# EAGLE board FlashDestroyer-v1 (EAGLE 5.06)
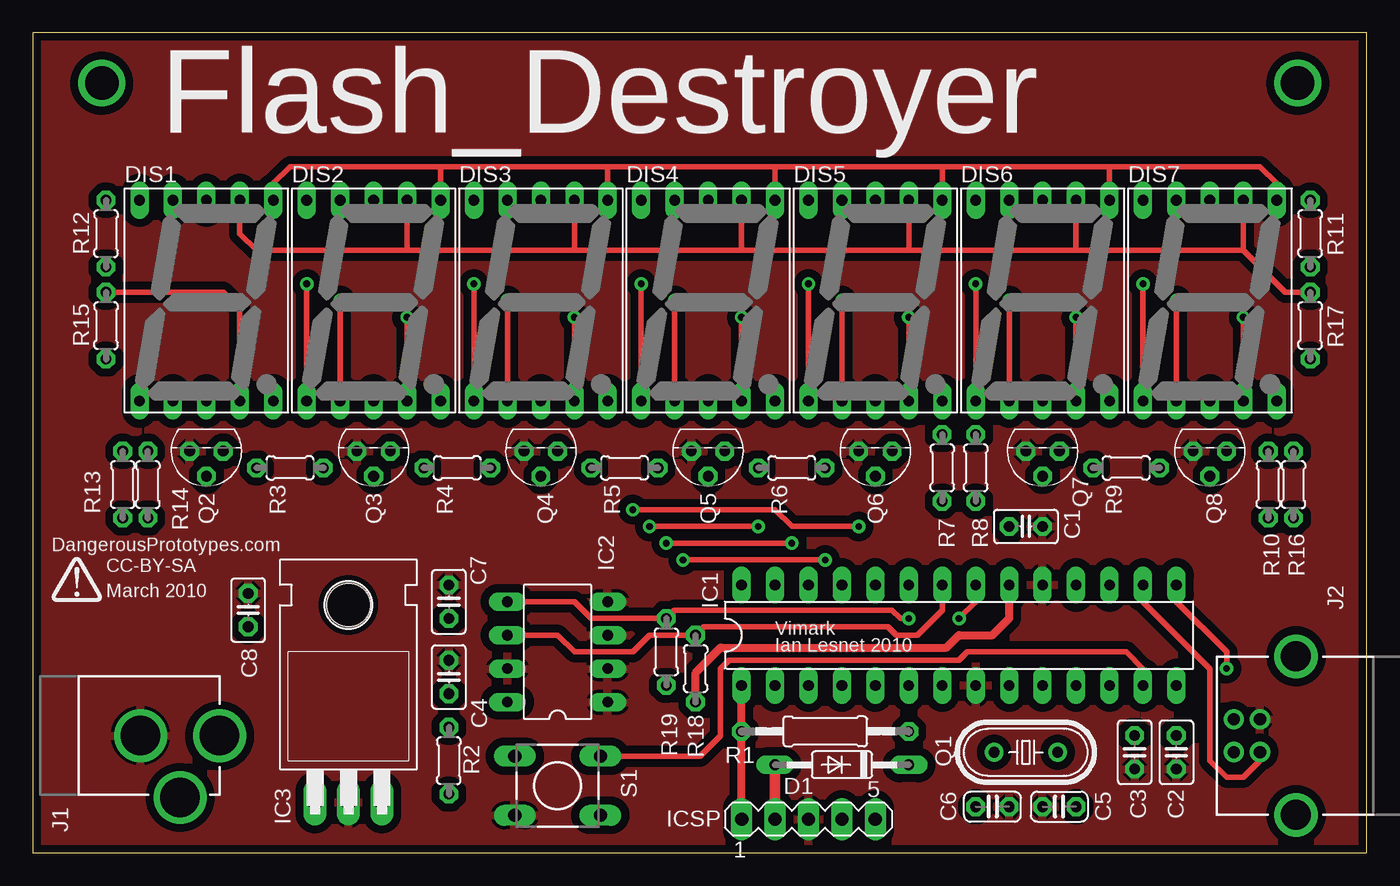
[diagram p0: board, top side]
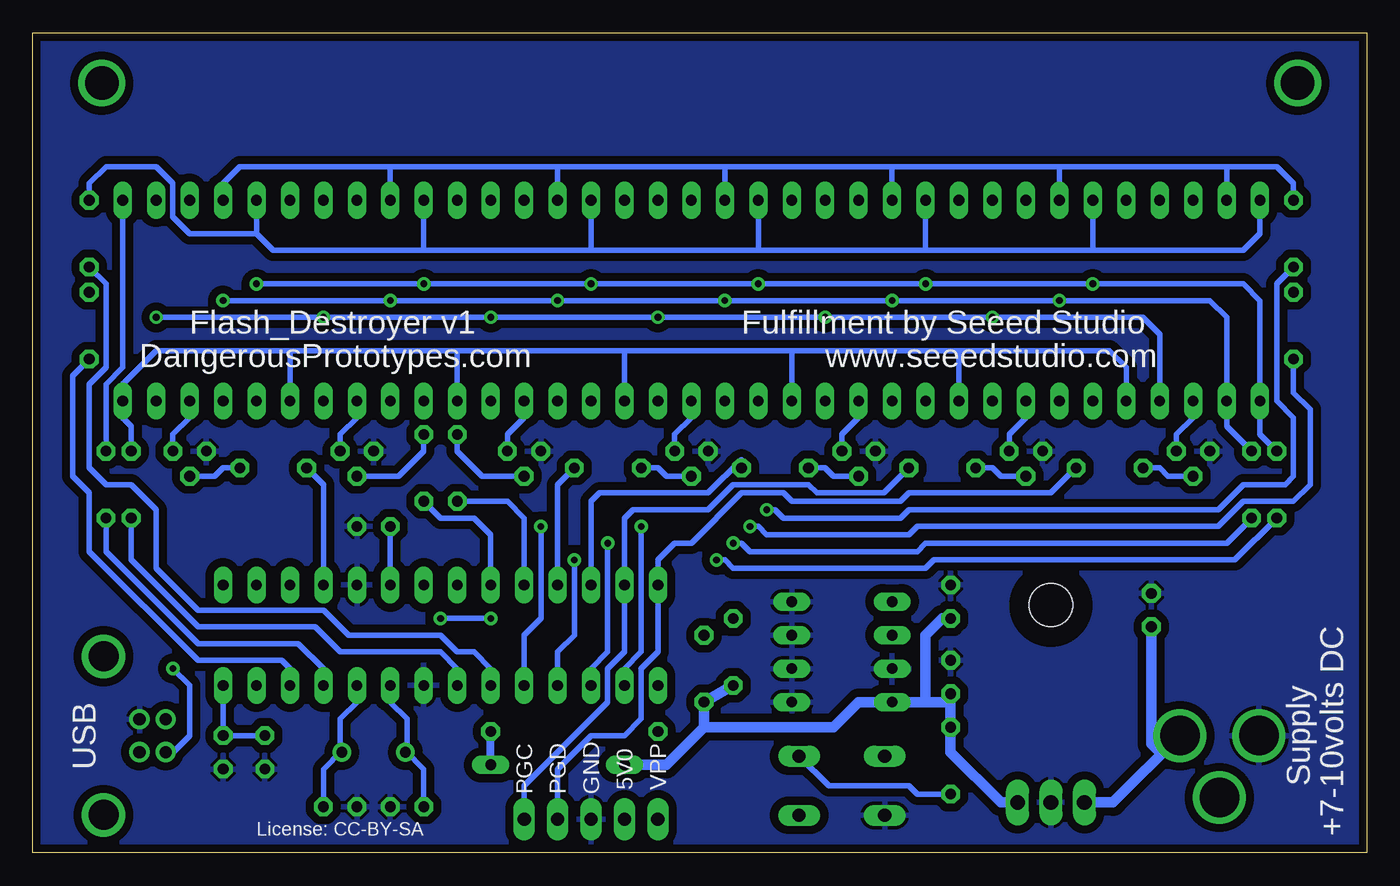
[diagram p1: board, bottom side, seen from below]

Size 101.27 x 62.22 mm. Coordinates in mm from the lower left corner, seen from the top.
Outline: 0,0 101.27,0 101.27,62.22 0,62.22 0,0
Copper layers (1*16): Top 0.035mm / dielectric 1.5mm / Bottom 0.035mm
Design rules "SparkFun": minimum track width 8mil, minimum drill 20mil, track to track 8mil, track to pad 8mil, pad to pad 8mil, via to via 8mil, smd to smd 8mil, copper to edge 10mil, drill to drill 8mil, minimum pad ring 12mil, minimum via ring 10mil, stop-mask expansion 4mil, vias tented up to drill 25mil, thermal gap 10mil

## Footprints (pad centres in the part's own frame; a part is rotated, then mirrored left to right if it is on the bottom)
C025-025X050 = drill 0.813 octagon: 1 -1.27,0; 2 1.27,0
C025-024X044 = drill 0.813 octagon: 1 -1.27,0; 2 1.27,0
DO35-10 = drill 0.813 long: A 5.08,0; C -5.08,0
HDSP-M = drill 0.813 long: 1 -5.08,-7.62; 2 -2.54,-7.62; 3 0,-7.62; 4 2.54,-7.62; 5 5.08,-7.62; 6 5.08,7.62; 7 2.54,7.62; 8 0,7.62; 9 -2.54,7.62; 10 -5.08,7.62
DIL28-3 = drill 0.813 long: 1 -16.51,-3.81; 2 -13.97,-3.81; 3 -11.43,-3.81; 4 -8.89,-3.81; 5 -6.35,-3.81; 6 -3.81,-3.81; 7 -1.27,-3.81; 8 1.27,-3.81; 9 3.81,-3.81; 10 6.35,-3.81; 11 8.89,-3.81; 12 11.43,-3.81; 13 13.97,-3.81; 14 16.51,-3.81; 15 16.51,3.81; 16 13.97,3.81; 17 11.43,3.81; 18 8.89,3.81; 19 6.35,3.81; 20 3.81,3.81; 21 1.27,3.81; 22 -1.27,3.81; 23 -3.81,3.81; 24 -6.35,3.81; 25 -8.89,3.81; 26 -11.43,3.81; 27 -13.97,3.81; 28 -16.51,3.81
DIL8 = drill 0.813 long: 1 -3.81,-3.81; 2 -1.27,-3.81; 3 1.27,-3.81; 4 3.81,-3.81; 5 3.81,3.81; 6 1.27,3.81; 7 -1.27,3.81; 8 -3.81,3.81
TO220H = drill 1.118 long: 1 -2.54,-10.16; 2 0,-10.16; 3 2.54,-10.16 | hole 3.302: 0,4.826
MA05-1 = drill 1.016 long: 1 -5.08,0; 2 -2.54,0; 3 0,0; 4 2.54,0; 5 5.08,0
POWER_JACK_PTH = drill 2.997 round: GND 0,7.7; GNDBREAK 4.7,10.7; PWR 0,13.7
USB-B-PTH = drill 0.914 round: D+ 0,1.25; D- 1.981,1.25; GND 0,-1.25; VBUS 1.981,-1.25 | drill 2.286 round: P$1 -2.718,-6.02; P$2 -2.718,6.02
HC49U-V = drill 0.813 round: 1 -2.413,0; 2 2.413,0
TO92 = drill 0.813 octagon: 1 1.27,0; 2 0,1.905; 3 -1.27,0
0207/12 = drill 0.813 octagon: 1 -6.35,0; 2 6.35,0
0204/5 = drill 0.813 octagon: 1 -2.54,0; 2 2.54,0
DTS-6 = drill 1 long: 1 -3.25,2.25; 2 3.25,2.25; 3 -3.25,-2.25; 4 3.25,-2.25

## Placement (x,y rotation side)
C1  0.1uf  [C025-025X050]  75.4,24.76 0 top
C2  0.1uf  [C025-025X050]  86.83,7.62 270 top
C3  0.1uf  [C025-025X050]  83.66,7.62 270 top
C4  0.1uf  [C025-025X050]  31.58,13.33 90 top
C5  27pf  [C025-024X044]  77.94,3.49 180 top
C6  27pf  [C025-024X044]  72.86,3.49 0 top
C7  0.1uf  [C025-025X050]  31.58,19.05 90 top
C8  0.33uf  [C025-025X050]  16.34,18.41 90 top
D1  1N4148  [DO35-10]  61.43,6.66 180 top
DIS1  HD-H103  [HDSP-M]  13.17,41.9 0 top
DIS2  HD-H103  [HDSP-M]  25.87,41.9 0 top
DIS3  HD-H103  [HDSP-M]  38.57,41.9 0 top
DIS4  HD-H103  [HDSP-M]  51.27,41.9 0 top
DIS5  HD-H103  [HDSP-M]  63.97,41.9 0 top
DIS6  HD-H103  [HDSP-M]  76.67,41.9 0 top
DIS7  HD-H103  [HDSP-M]  89.37,41.9 0 top
IC1  PIC18F2550_28DIP  [DIL28-3]  70.32,16.51 0 top
IC2  24AA01P  [DIL8]  39.84,15.23 90 top
IC3  7805T  [TO220H]  23.96,13.96 0 top
ICSP  [MA05-1]  58.89,2.54 0 top
J1  POWER_JACKPTH  [POWER_JACK_PTH]  0.47,8.88 270 top
J2  USBPTH  [USB-B-PTH]  93.18,8.88 180 top
Q1  20Mhz  [HC49U-V]  75.4,7.62 180 top
Q2  BC547  [TO92]  13.17,30.48 180 top
Q3  BC547  [TO92]  25.87,30.48 180 top
Q4  BC547  [TO92]  38.57,30.48 180 top
Q5  BC547  [TO92]  51.27,30.48 180 top
Q6  BC547  [TO92]  63.97,30.48 180 top
Q7  BC547  [TO92]  76.67,30.48 180 top
Q8  BC547  [TO92]  89.37,30.48 180 top
R1  10k  [0207/12]  60.16,9.2 0 top
R2  10K  [0204/5]  31.58,6.98 90 top
R3  10k  [0204/5]  19.52,29.21 180 top
R4  10k  [0204/5]  32.22,29.21 180 top
R5  10k  [0204/5]  44.92,29.21 180 top
R6  10k  [0204/5]  57.62,29.21 180 top
R7  10k  [0204/5]  69.05,29.21 90 top
R8  10k  [0204/5]  71.59,29.21 90 top
R9  10k  [0204/5]  83.02,29.21 0 top
R10  100R  [0204/5]  93.81,27.94 90 top
R11  100R  [0204/5]  96.99,46.98 90 top
R12  100R  [0204/5]  5.55,46.98 90 top
R13  100R  [0204/5]  6.82,27.94 90 top
R14  100R  [0204/5]  8.72,27.94 90 top
R15  100R  [0204/5]  5.55,40 90 top
R16  100R  [0204/5]  95.72,27.94 90 top
R17  100R  [0204/5]  96.99,40 90 top
R18  2K2  [0204/5]  50.32,13.96 270 top
R19  2K2  [0204/5]  48.1,15.23 270 top
S1  DTS-6  [DTS-6]  39.84,5.08 180 top
U$1  [DP-LOGO]  1.42,19.05 0 top

## Library data of the parts
C1-C8 R1-R19 = rcl
D1 = diode
DIS1-DIS7 = display-hp
IC1 IC2 = microchip
IC3 = linear
ICSP = con-lstb
J1 J2 = SparkFun
Q1 = crystal
Q2-Q8 = transistor-npn
S1 = switch-tact
U$1 = dp_devices

## Nets
A: DIS1.7 DIS2.7 DIS3.7 DIS4.7 DIS5.7 DIS6.7 DIS7.7 R17.2
B: DIS1.6 DIS2.6 DIS3.6 DIS4.6 DIS5.6 DIS6.6 DIS7.6 R16.2
C: DIS1.4 DIS2.4 DIS3.4 DIS4.4 DIS5.4 DIS6.4 DIS7.4 R15.2
CC1: IC1.28 ICSP.4 R3.1
CC2: IC1.27 ICSP.5 R4.1
CC3: IC1.26 R5.1
CC4: IC1.25 R6.1
CC5: IC1.24 R7.1
CC6: IC1.23 R8.1
CC7: IC1.18 R9.1
D: DIS1.2 DIS2.2 DIS3.2 DIS4.2 DIS5.2 DIS6.2 DIS7.2 R14.2
DP: DIS1.5 DIS2.5 DIS3.5 DIS4.5 DIS5.5 DIS6.5 DIS7.5 R10.2
E: DIS1.1 DIS2.1 DIS3.1 DIS4.1 DIS5.1 DIS6.1 DIS7.1 R13.2
F: DIS1.9 DIS2.9 DIS3.9 DIS4.9 DIS5.9 DIS6.9 DIS7.9 R12.2
G: DIS1.10 DIS2.10 DIS3.10 DIS4.10 DIS5.10 DIS6.10 DIS7.10 R11.2
GND: C1.2 C2.2 C3.2 C4.2 C5.2 C6.2 C7.2 C8.2 IC1.8 IC1.19 IC2.1 IC2.2 IC2.3 IC2.4 IC2.7 IC3.2 ICSP.3 J1.GND J2.GND Q2.1 Q3.1 Q4.1 Q5.1 Q6.1 Q7.1 Q8.1 S1.2
MCLR: IC1.1 ICSP.1 R1.1
N$1: C6.1 IC1.9 Q1.2
N$2: C5.1 IC1.10 Q1.1
N$3: C2.1 C3.1 IC1.14
N$4: IC1.7 R10.1
N$5: IC1.6 R11.1
N$6: DIS2.3 Q3.3
N$7: IC1.5 R12.1
N$8: Q3.2 R4.2
N$9: DIS3.3 Q4.3
N$10: Q4.2 R5.2
N$11: DIS4.3 Q5.3
N$12: Q5.2 R6.2
N$13: DIS5.3 Q6.3
N$14: Q6.2 R7.2
N$15: DIS1.3 Q2.3
N$16: Q2.2 R3.2
N$17: D1.C R1.2
N$18: DIS6.3 Q7.3
N$19: Q7.2 R8.2
N$20: DIS7.3 Q8.3
N$21: Q8.2 R9.2
N$22: IC1.4 R13.1
N$23: IC1.3 R14.1
N$24: IC1.2 R15.1
N$25: IC1.11 R16.1
N$26: IC1.12 R17.1
N$27: IC1.13 R2.1 S1.3
N$29: C8.1 IC3.1 J1.PWR
RC4: IC1.15 J2.D-
RC5: IC1.16 J2.D+
SCL: IC1.22 IC2.6 R18.1
SDA: IC1.21 IC2.5 R19.1
VCC: C1.1 C4.1 C7.1 D1.A IC1.20 IC2.8 IC3.3 ICSP.2 R2.2 R18.2 R19.2

## Tracks (layer width: path | path; a pad name or v marks a point on that pad's centre or on a via)
A
  Top 0.406: DIS1.7 15.71,46.98 16.98,45.71 28.41,45.71 | 28.41,45.71 DIS2.7 | 28.41,45.71 41.11,45.71 | 41.11,45.71 53.81,45.71 | 53.81,45.71 66.51,45.71 | 66.51,45.71 79.21,45.71 | 79.21,45.71 91.91,45.71 | 79.21,45.71 DIS6.7 | 41.11,45.71 DIS3.7 | 53.81,45.71 DIS4.7 | 66.51,45.71 DIS5.7 | 91.91,45.71 DIS7.7 | 91.91,45.71 95.09,42.54 R17.2
B
  Top 0.406: DIS1.6 18.25,50.79 19.52,52.06 30.95,52.06 | 30.95,52.06 DIS2.6 | 30.95,52.06 43.65,52.06 | 43.65,52.06 DIS3.6 | 43.65,52.06 56.35,52.06 | 56.35,52.06 DIS4.6 | 56.35,52.06 69.05,52.06 | 69.05,52.06 DIS5.6 | 69.05,52.06 81.75,52.06 | 81.75,52.06 DIS6.6 | 81.75,52.06 93.18,52.06 94.45,50.79 DIS7.6
  Bottom 0.406: DIS7.6 94.45,36.82 95.72,35.55 R16.2
C  (via drill 0.51)
  Top 0.406: v28.41,40.63 DIS2.4 | DIS1.4 15.71,41.27 14.44,42.54 R15.2 | v91.91,40.63 DIS7.4 | v41.11,40.63 DIS3.4 | v79.21,40.63 DIS6.4 | v66.51,40.63 DIS5.4 | v53.81,40.63 DIS4.4
  Bottom 0.406: DIS1.4 15.71,39.36 16.98,40.63 v28.41,40.63 v41.11,40.63 v53.81,40.63 v66.51,40.63 v79.21,40.63 v91.91,40.63
CC1
  Bottom 0.406: R3.1 23.96,27.3 34.76,27.3 35.4,26.67 43.65,26.67 44.29,27.3 47.46,27.3 51.27,23.49 52.54,23.49 53.81,22.22 IC1.28 53.81,15.23 55.08,13.96 55.08,10.15 56.35,8.88 58.89,8.88 61.43,6.34 ICSP.4
CC2
  Bottom 0.406: R4.1 36.67,27.3 41.75,27.3 42.38,27.94 48.1,27.94 50,26.03 55.72,26.03 56.35,25.39 IC1.27 56.35,15.23 57.62,13.96 57.62,11.42 63.97,5.08 ICSP.5
CC3
  Bottom 0.406: IC1.26 58.89,26.67 58.26,27.3 50,27.3 47.46,29.84 R5.1
CC4
  Bottom 0.406: R6.1 61.43,27.94 IC1.25
CC5
  Bottom 0.406: R7.1 65.24,26.67 63.97,25.39 IC1.24
CC6
  Bottom 0.406: R8.1 70.32,25.39 67.78,25.39 66.51,24.12 IC1.23
CC7
  Bottom 0.406: R9.1 79.21,27.94 IC1.18
D  (via drill 0.51)
  Top 0.406: v23.33,41.9 DIS2.2 | v86.83,41.9 DIS7.2 | v36.03,41.9 DIS3.2 | v74.13,41.9 DIS6.2 | v48.73,41.9 DIS4.2 | v61.43,41.9 DIS5.2
  Bottom 0.406: v86.83,41.9 v74.13,41.9 v61.43,41.9 v48.73,41.9 v36.03,41.9 v23.33,41.9 11.9,41.9 10.63,40.63 DIS1.2 10.63,32.38 R14.2
DP
  Bottom 0.406: DIS1.5 18.25,36.82 19.52,38.09 30.95,38.09 | 30.95,38.09 DIS2.5 | 30.95,38.09 43.65,38.09 | 43.65,38.09 56.35,38.09 | 56.35,38.09 69.05,38.09 | 69.05,38.09 81.75,38.09 | 81.75,38.09 91.91,38.09 94.45,35.55 DIS7.5 94.45,33.02 93.81,32.38 R10.2 | 81.75,38.09 DIS6.5 | 56.35,38.09 DIS4.5 | 43.65,38.09 DIS3.5 | 69.05,38.09 DIS5.5
E  (via drill 0.51)
  Top 0.406: v20.79,43.17 DIS2.1 | v33.49,43.17 DIS3.1 | v46.19,43.17 DIS4.1 | v84.29,43.17 DIS7.1 | v58.89,43.17 DIS5.1 | v71.59,43.17 DIS6.1
  Bottom 0.406: v84.29,43.17 v71.59,43.17 v58.89,43.17 v46.19,43.17 v33.49,43.17 v20.79,43.17 9.36,43.17 8.09,41.9 DIS1.1 8.09,31.75 R13.2
F
  Bottom 0.406: 10.63,52.06 DIS1.9 | 10.63,52.06 23.33,52.06 | 23.33,52.06 DIS2.9 | 23.33,52.06 36.03,52.06 | 36.03,52.06 DIS3.9 | 36.03,52.06 48.73,52.06 | 48.73,52.06 DIS4.9 | 48.73,52.06 61.43,52.06 | 61.43,52.06 DIS5.9 | 61.43,52.06 74.13,52.06 | 74.13,52.06 DIS6.9 | 74.13,52.06 85.56,52.06 86.83,50.79 DIS7.9 | 10.63,52.06 6.82,52.06 5.55,50.79 R12.2
G
  Bottom 0.406: DIS1.10 8.09,46.98 9.36,45.71 20.79,45.71 | 20.79,45.71 DIS2.10 | 20.79,45.71 33.49,45.71 | 33.49,45.71 46.19,45.71 | 46.19,45.71 58.89,45.71 | 58.89,45.71 71.59,45.71 | 71.59,45.71 83.02,45.71 84.29,46.98 | 71.59,45.71 DIS6.10 | 58.89,45.71 DIS5.10 | 46.19,45.71 DIS4.10 | 33.49,45.71 DIS3.10 | 84.29,46.98 DIS7.10 | 84.29,46.98 89.37,46.98 90.64,48.25 90.64,50.79 91.91,52.06 95.72,52.06 96.99,50.79 R11.2
GND
  pour Top (isolate 0.61): 0.47,62.22 103.34,62.22 103.34,-0.01 0.47,-0.01
  pour Bottom (isolate 0.61): 0.47,62.22 103.34,62.22 103.34,-0.01 0.47,-0.01
MCLR
  Top 0.61: ICSP.1 R1.1 IC1.1
N$1
  Bottom 0.406: IC1.9 74.13,11.42 72.86,10.15 72.86,8.38 Q1.2 72.99,7.74 71.59,6.34 C6.1
N$2
  Bottom 0.406: IC1.10 76.67,11.42 77.94,10.15 77.94,8.38 Q1.1 77.81,7.74 79.21,6.34 C5.1
N$3
  Bottom 0.406: IC1.14 C2.1 C3.1
N$4
  Bottom 0.406: IC1.7 69.05,13.96 70.32,15.23 77.94,15.23 79.84,17.14 88.73,17.14 93.81,22.22 R10.1
N$5
  Bottom 0.406: R11.1 95.72,43.17 95.72,36.82 96.99,35.55 96.99,29.21 95.72,27.94 93.81,27.94 91.91,26.03 91.91,21.59 88.73,18.41 79.21,18.41 77.31,16.51 70.32,16.51 69.05,15.23 67.78,15.23 66.51,13.96 IC1.6
N$6
  Bottom 0.406: Q3.3 27.14,31.75 25.87,33.02 DIS2.3
N$7  (via drill 0.51)
  Top 0.406: v45.55,26.03 56.35,26.03 57.62,24.76 v62.7,24.76
  Bottom 0.406: R12.1 6.82,43.17 6.82,34.28 5.55,33.02 5.55,28.57 6.19,27.94 9.36,27.94 11.26,26.03 34.76,26.03 35.4,25.39 44.29,25.39 44.92,26.03 v45.55,26.03 | IC1.5 63.97,16.51 62.7,17.78 v62.7,24.76
N$8
  Bottom 0.406: Q3.2 27.77,28.57 28.41,29.21 R4.2
N$9
  Bottom 0.406: DIS3.3 38.57,33.02 39.84,31.75 Q4.3
N$10
  Bottom 0.406: Q4.2 40.48,28.57 41.11,29.21 R5.2
N$11
  Bottom 0.406: DIS4.3 51.27,33.02 52.54,31.75 Q5.3
N$12
  Bottom 0.406: Q5.2 53.18,28.57 53.81,29.21 R6.2
N$13
  Bottom 0.406: DIS5.3 63.97,33.02 65.24,31.75 Q6.3
N$14
  Bottom 0.406: Q6.2 67.14,28.57 69.05,30.48 R7.2
N$15
  Bottom 0.406: Q2.3 14.44,31.75 13.17,33.02 DIS1.3
N$16
  Bottom 0.406: Q2.2 15.07,28.57 15.71,29.21 R3.2
N$17
  Bottom 0.61: D1.C R1.2
N$18
  Bottom 0.406: DIS6.3 76.67,33.02 77.94,31.75 Q7.3
N$19
  Bottom 0.406: Q7.2 73.5,28.57 71.59,30.48 R8.2
N$20
  Bottom 0.406: DIS7.3 89.37,33.02 90.64,31.75 Q8.3
N$21
  Bottom 0.406: R9.2 86.83,29.21 87.47,28.57 Q8.2
N$22  (via drill 0.51)
  Top 0.406: v49.37,22.22 v60.16,22.22
  Bottom 0.406: IC1.4 61.43,15.23 60.16,16.51 v60.16,22.22 | v49.37,22.22 48.73,22.22 48.1,21.59 33.49,21.59 32.86,22.22 9.99,22.22 R13.1
N$23  (via drill 0.51)
  Top 0.406: v48.1,23.49 v57.62,23.49
  Bottom 0.406: IC1.3 58.89,13.96 57.62,15.23 v57.62,23.49 | v48.1,23.49 47.46,23.49 46.83,22.86 34.12,22.86 33.49,23.49 10.63,23.49 R14.1
N$24  (via drill 0.51)
  Top 0.406: v46.83,24.76 v55.08,24.76
  Bottom 0.406: R15.1 5.55,34.92 4.28,33.65 4.28,27.94 5.55,26.67 9.36,26.67 11.26,24.76 34.12,24.76 34.76,24.12 45.55,24.12 46.19,24.76 v46.83,24.76 | IC1.2 56.35,13.96 55.08,15.23 v55.08,24.76
N$25
  Bottom 0.406: IC1.11 79.21,13.96 81.12,15.87 88.73,15.87 95.72,22.86 R16.1
N$26
  Bottom 0.406: R17.1 98.26,36.19 98.26,28.57 96.99,27.3 96.99,22.86 88.73,14.6 82.39,14.6 81.75,13.96 IC1.12
N$27
  Top 0.406: IC1.13 84.29,13.96 83.02,15.23 70.95,15.23 70.32,14.6 52.86,14.6 52.22,13.96 52.22,8.88 50.64,7.3 43.12,7.3 S1.3
  Bottom 0.406: R2.1 34.12,4.44 34.76,5.08 40.84,5.08 S1.3
N$28  (via drill 2.54)
  other vias: 5.23,58.41
N$29
  Bottom 0.813: C8.1 16.34,8.25 15.71,7.62 J1.PWR 19.25,3.81 IC3.1
N$30  (via drill 2.54)
  other vias: 96.04,58.41
RC4  (via drill 0.51)
  Top 0.406: v90.64,13.96 90.64,15.23 86.83,19.05 IC1.15
  Bottom 0.406: J2.D- 90.62,7.63 89.37,8.88 89.37,12.69 v90.64,13.96
RC5
  Top 0.406: IC1.16 84.29,19.05 89.37,13.96 89.37,6.98 90.64,5.71 91.91,5.71 93.18,6.98 J2.D+
SCL
  Top 0.406: IC1.22 69.05,18.41 67.14,16.51 65.56,16.51 64.92,17.14 50.95,17.14 R18.1 46.83,16.51 45.55,15.23 41.11,15.23 39.84,16.51 IC2.6
SDA  (via drill 0.51)
  Top 0.406: IC1.21 71.59,19.05 v70.32,17.78 | IC2.5 41.11,19.05 42.38,17.78 R19.1 48.73,18.41 65.24,18.41 65.88,17.78 v66.51,17.78
  Bottom 0.406: v66.51,17.78 v70.32,17.78
VCC
  Top 0.61: R18.2 50.32,13.65 52.22,15.55 69.37,15.55 70.32,16.51 72.86,16.51 74.13,17.78 IC1.20
  Top 0.813: D1.A ICSP.2
  Bottom 0.406: IC1.20 C1.1
  Bottom 0.813: D1.A 53.18,6.66 50.32,9.52 | R19.2 R18.2 50.32,9.52 | 31.58,11.42 33.49,11.42 | 33.49,11.42 IC2.8 38.57,11.42 40.48,9.52 50.32,9.52 | 31.58,11.42 C4.1 | 31.58,11.42 R2.2 31.58,7.62 27.77,3.81 IC3.3 | C7.1 32.22,17.78 33.49,16.51 33.49,11.42

## Text on the board
tNames: Flash_Destroyer | DangerousPrototypes.com | CC-BY-SA | March 2010 | Vimark | Ian Lesnet 2010
bNames: Fulfillment by Seeed Studio | Flash_Destroyer v1 | www.seeedstudio.com | DangerousPrototypes.com | USB | Supply | VPP | 5V0 | GND | PGD | PGC | +7-10volts DC | License: CC-BY-SA
Reference: FLASH DESTROYER V1 | CC-BY-SA | Ian Lesnet 2010 | http://dangerousprototypes.com